# Altium PCB Dual_Channel_Common_VCC_PCB.PcbDoc
Units mm, origin at the board's own origin, x right, y up, seen from the top; angles counter-clockwise.
Board outline 41.15 x 32.38 mm, 2 copper layers (Top Layer, Bottom Layer); 9 components, 14 nets, 33 pads, 0 vias.
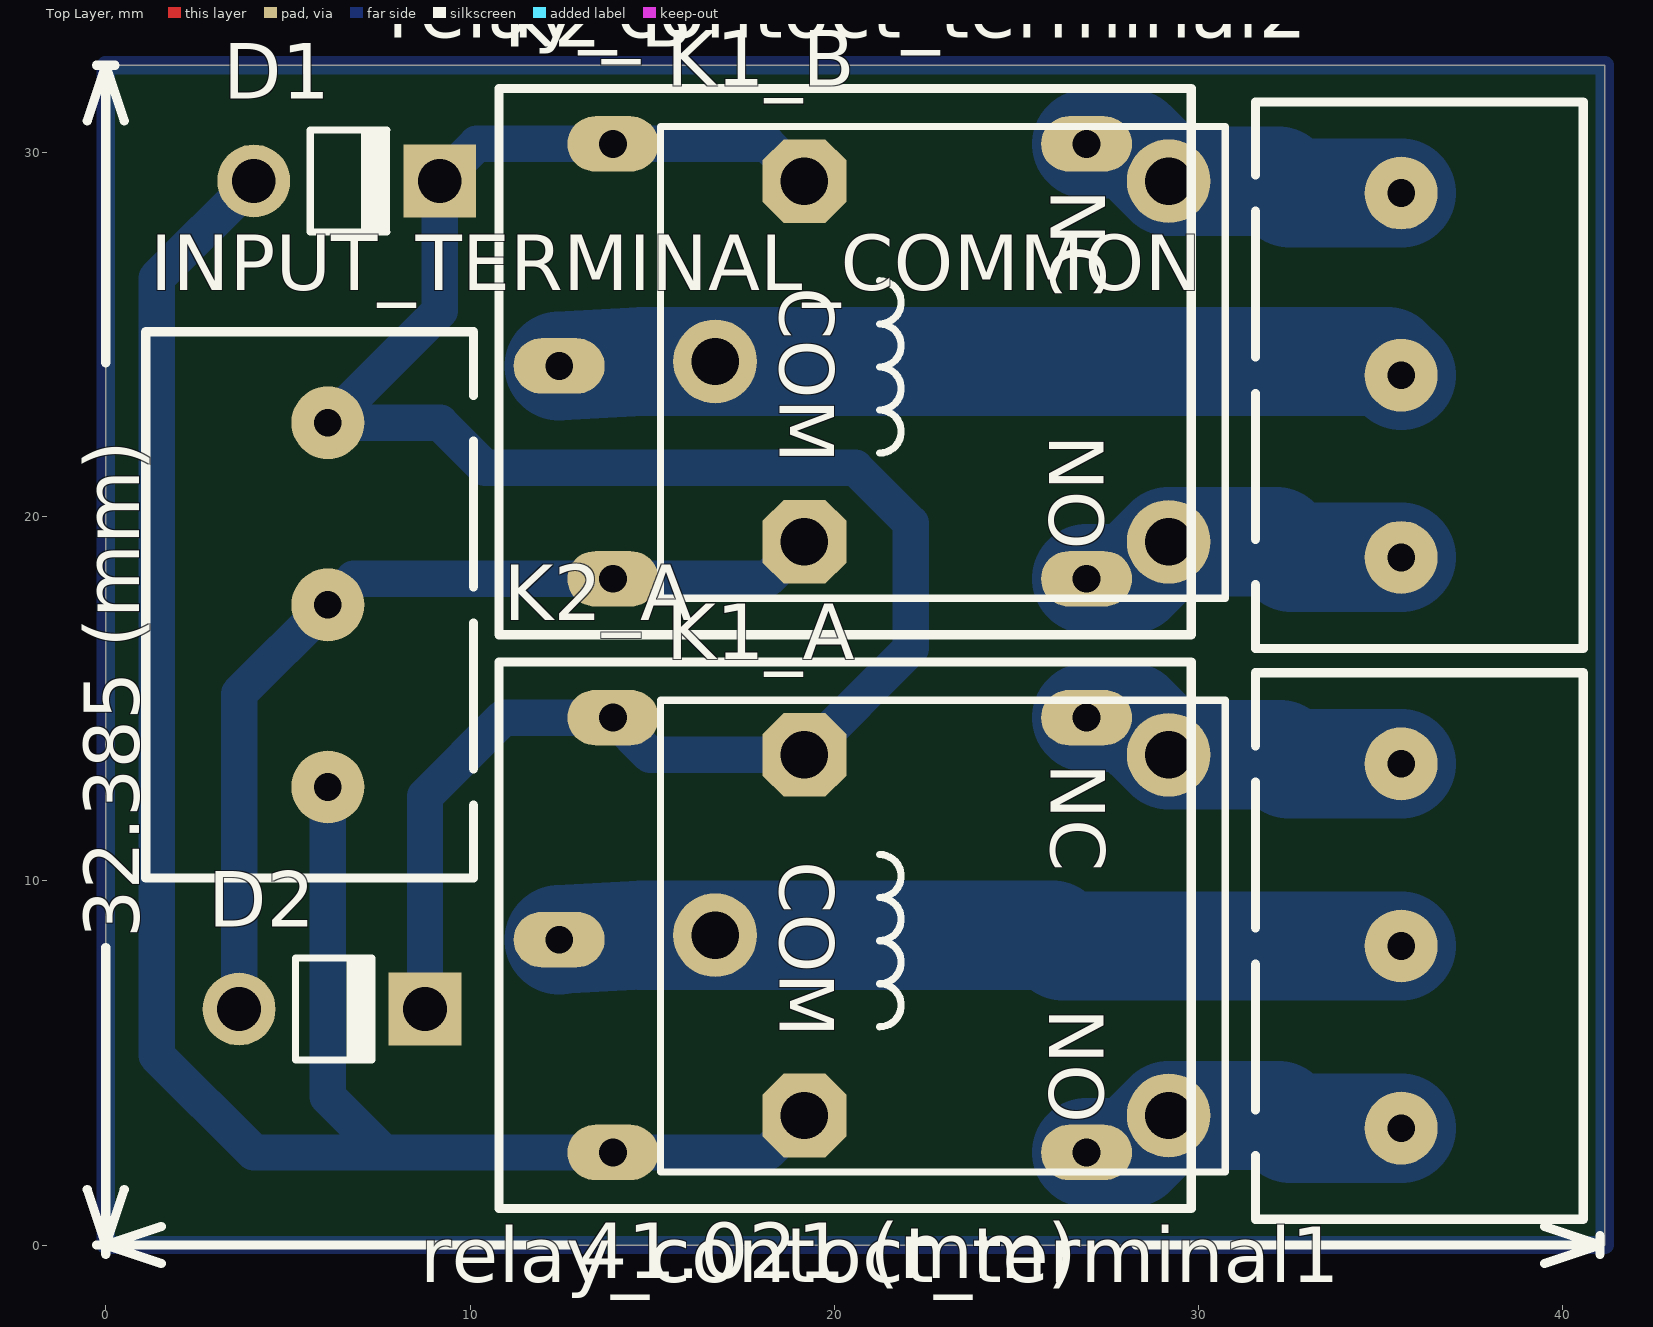
[diagram p0: Top Layer view]
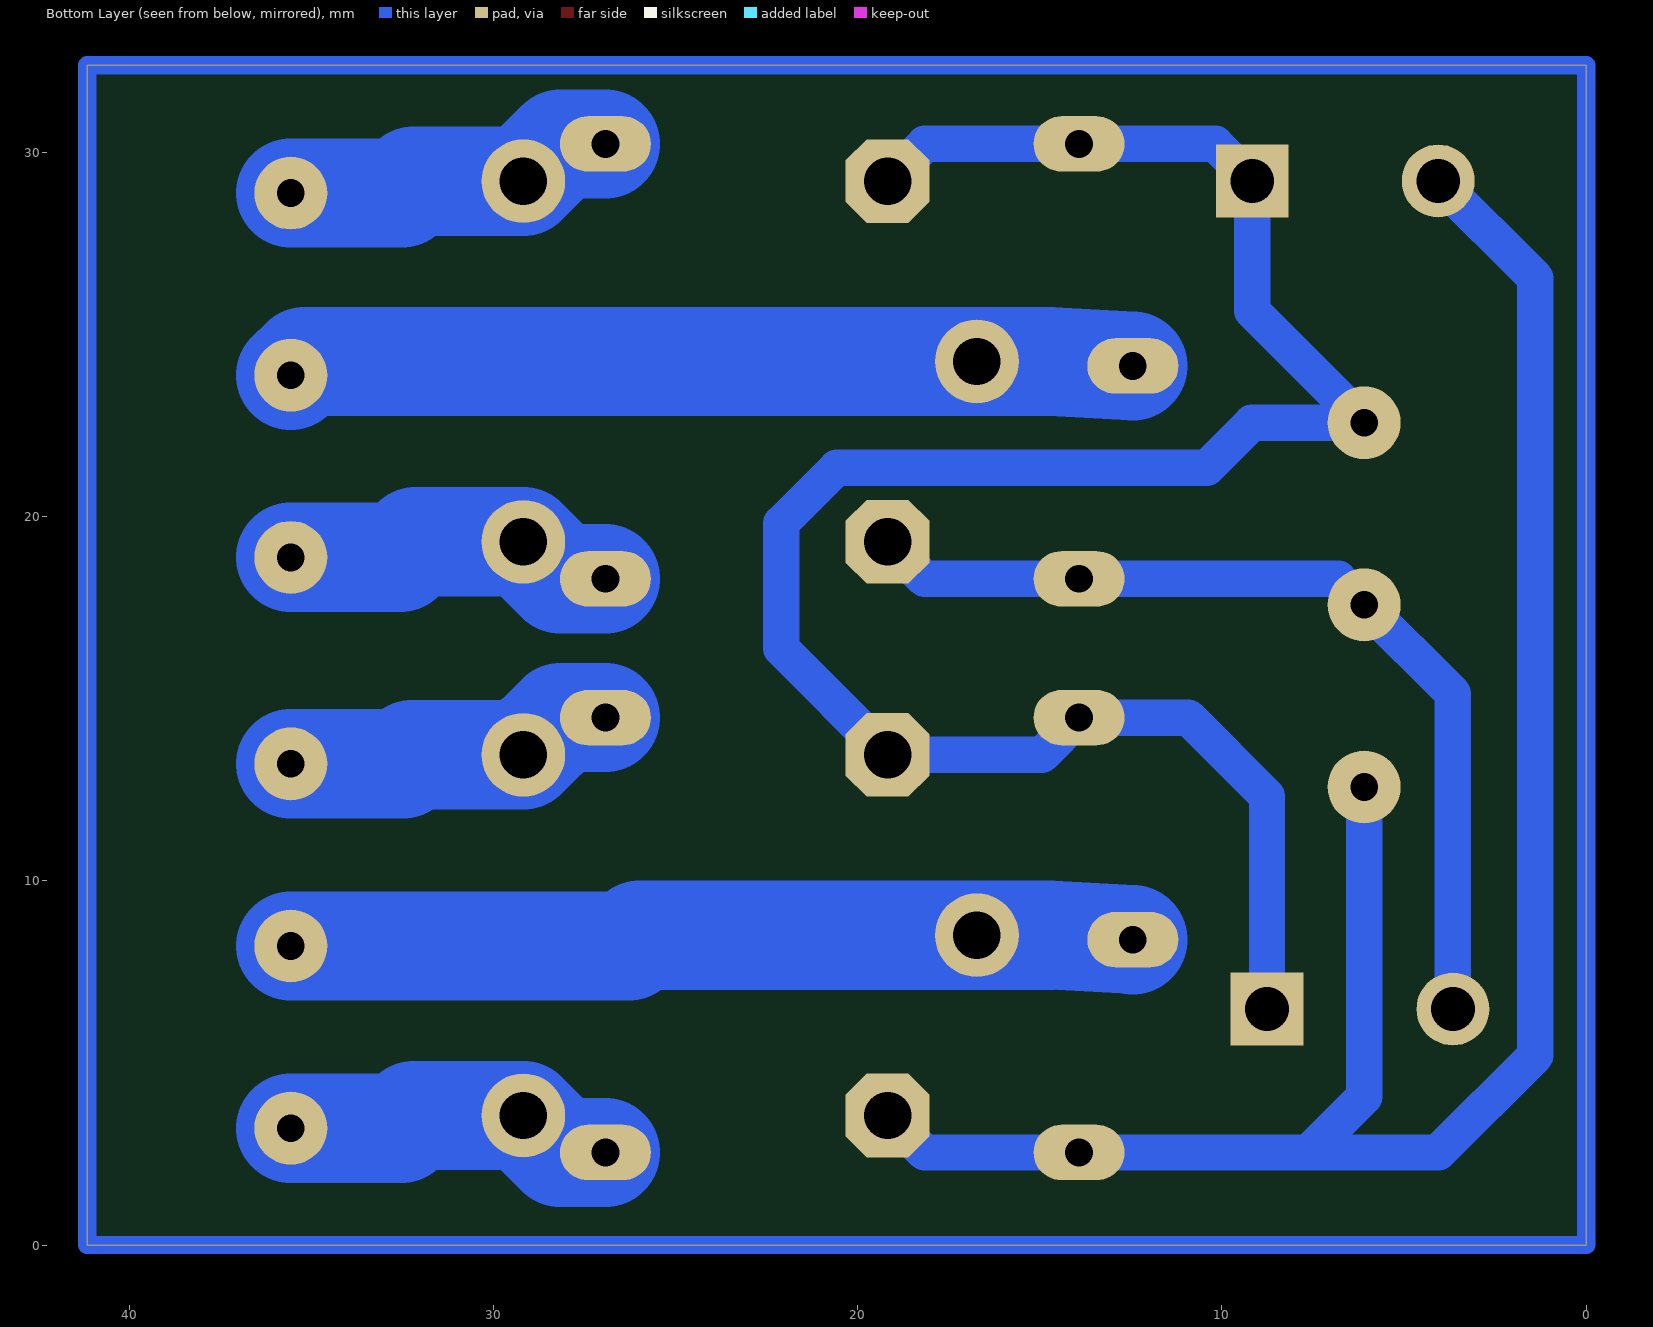
[diagram p1: Bottom Layer view, seen from below]

## Layer stack, top to bottom
Top Solder: solder mask 0.0102, Solder Resist, Dk 3.5
Top Layer: signal copper 0.0356
Dielectric 1: dielectric 0.32, FR-4, Dk 4.8
Bottom Layer: signal copper 0.0356
Bottom Solder: solder mask 0.0102, Solder Resist, Dk 3.5

## Board outline
0,0 0,32.385 41.148,32.385 41.148,0

## Design rules (kind name [scope] priority, off if disabled: settings)
Clearance [All] p1: gap=0.3 ignorepadtopadclearanceinfootprint=FALSE
PolygonConnect [All] p1: connectstyle=Relief reliefconductorwidth=0.254 reliefentries=4 polygonreliefangle="90 Angle" airgapwidth=0.254
RoutingLayers [All] p1: top layer_v5=FALSE bottom layer_v5=TRUE
RoutingVias [All] p1: holewidth=0.711 width=1.27 viastyle="Through Hole" minholewidth=0.711 minwidth=1.27 maxholewidth=0.711 maxwidth=1.27
SolderMaskExpansion [All] p1: expansion=0.102
Width [All] p1: maxlimit=1 minlimit=0.3 preferedwidth=0.5
29 further rules are at their usual default settings.

## Components (designator, comment, footprint, x,y, rotation, side; value= is the part's Value field where it differs from the comment)
D1 "Diode 1N4007 vertical" "D 50mm" 9.294,29.21 r0 top
D2 "Diode 1N4007 vertical" "D 50mm" 8.89,6.477 r0 top
INPUT_TERMINAL_COMMON "Terminal" "Terminal 1*3" 10.096,10.073 r90 top
K1_A "Relay" "Relay 15.40x12.10x13.10" 16.727,8.506 r270 top
K1_B "Relay" "Relay 15.40x12.10x13.10" 16.727,24.254 r270 top
K2_A "Relay-05vDC" Relays 10.795,16.002 r270 top
K2_B "Relay-05vDC" Relays 10.795,31.75 r270 top
relay_contoct_terminal1 "Terminal" "Terminal 1*3" 31.56,15.708 r270 top
relay_contoct_terminal2 "Terminal" "Terminal 1*3" 31.56,31.376 r270 top

## Footprints (in the part's own frame and the unit in brackets; to place one, negate y for a bottom-side part, rotate by r counter-clockwise, add the part's x,y. Pads: shape width x height; smd on the part's side, far side on the other; paste and mask are expansions set on the pad)
"D 50mm" [mm] "50mm Pin Spacing"
  round 2 hole 1.2: 1(-5.23,0)
  rect 2x2 hole 1.2: 2(-0.127,0)
  silkscreen extent -3.68,-1.4 -1.49,1.4
"Relay 15.40x12.10x13.10" [mm]
  round 2.3 hole 1.3: 1(0,0) 2(-4.95,12.45) 3(4.95,12.45)
  oct 2.3x2.3 hole 1.3: 4(-4.95,2.45) 5(4.95,2.45)
  silkscreen extent -6.45,-1.5 6.5,14, body extent -6.05,-1.3 6.05,14, height 15.6
Relays [mil]
  oval 60x98.43 hole 30: 1(300,65) 2(60,635) 3(530,635) 4(60,123.11) 5(530,123.11)
  silkscreen extent 0,0 591,748
"Terminal 1*3" [mm]
  round 2 hole 0.762: 1(2.5,4) 2(7.5,4) 3(12.5,4)
  silkscreen extent 0,0 15,9

## Part data
D1 D2: "1 Amp General Purpose Rectifier", Publisher="seyed mohsen ghasemian"
INPUT_TERMINAL_COMMON relay_contoct_terminal1 relay_contoct_terminal2: library part "Terminal 1*3", "Terminal 3 Pin 250VAC 16A", ComponentLinkURL=www.picpars.com, Designer="Seyed Mohsen Ghasemain", E-mail=picpars@gmail.com
K1_A K1_B: "SPDT Relay", Company=E.P.I.L, Design_Date=2011/10/31, Designer="Eng. Saeid Jorablo"
K2_A K2_B: "Relay-05vDC-240AC 5A", ComponentLinkURL=www.picpars.com, Designer="Seyed Mohsen Ghasemain"

## Nets (pads, with @x,y where several pads share a name; then routed paths per layer and width w, separated by ;. In a path a pad name is that pad's centre, name@x,y a point inside that pad or via, vN(x,y) a via of type N, cw(c..) or ccw(c..) an arc to the next point about the centre after c; other vN are vias at no path point)
GND: 
NetD1_1: D1.1 INPUT_TERMINAL_COMMON.1 K1_A.5 K2_A.5 | length 55.1
  Bottom Layer w1: D1.1 1.397,26.543 1.397,5.207 4.064,2.54 7.62,2.54 ; INPUT_TERMINAL_COMMON.1 6.096,4.064 7.62,2.54 ; K1_A.5 18.161,2.54 K2_A.5 7.62,2.54
NetD2_1: D2.1 INPUT_TERMINAL_COMMON.2 K1_B.5 K2_B.5 | length 25.9
  Bottom Layer w1: D2.1 3.66,15.137 INPUT_TERMINAL_COMMON.2 6.811,18.288 K2_B.5 18.161,18.288 K1_B.5
NetK1_A_1: K1_A.1 K2_A.1 relay_contoct_terminal1.2 | length 23.2
  Bottom Layer w0.5: 25.984,8.506 26.282,8.208
  Bottom Layer w3: K2_A.1 14.704,8.506 K1_A.1 25.984,8.506 ; 26.282,8.208 relay_contoct_terminal1.2
NetK1_A_2: K1_A.2 K2_A.2 relay_contoct_terminal1.1 | length 9.2
  Bottom Layer w3: K2_A.2 28.155,14.478 K1_A.2 32.233,13.456 32.481,13.208 relay_contoct_terminal1.1
NetK1_A_3: K1_A.3 K2_A.3 relay_contoct_terminal1.3 | length 9.2
  Bottom Layer w0.5: 32.182,3.556 32.53,3.208
  Bottom Layer w3: K2_A.3 28.161,2.54 K1_A.3 32.182,3.556 ; 32.53,3.208 relay_contoct_terminal1.3
NetK1_B_1: K1_B.1 K2_B.1 relay_contoct_terminal2.2 | length 23.3
  Bottom Layer w3: K2_B.1 14.704,24.254 K1_B.1 35.182,24.254 relay_contoct_terminal2.2
NetK1_B_2: K1_B.2 K2_B.2 relay_contoct_terminal2.1 | length 9.2
  Bottom Layer w0.5: 32.182,29.204 32.51,28.876
  Bottom Layer w3: K2_B.2 28.155,30.226 K1_B.2 32.182,29.204 ; 32.51,28.876 relay_contoct_terminal2.1
NetK1_B_3: K1_B.3 K2_B.3 relay_contoct_terminal2.3 | length 9.2
  Bottom Layer w3: K2_B.3 28.161,18.288 K1_B.3 32.131,19.304 32.559,18.876 relay_contoct_terminal2.3
NetK2_1: 
NetK2_2: 
NetK2_3: 
NetLED_1: 
VCC: D1.2 D2.2 INPUT_TERMINAL_COMMON.3 K1_A.4 K1_B.4 K2_A.4 K2_B.4 | length 61
  Bottom Layer w1: D2.2 8.763,12.319 10.922,14.478 K2_A.4 14.944,13.456 K1_A.4 22.098,16.377 22.098,19.812 20.574,21.336 10.414,21.336 9.177,22.573 INPUT_TERMINAL_COMMON.3 9.167,25.644 D1.2 10.183,30.226 K2_B.4 18.155,30.226 K1_B.4
copper on no net: | length 147.1
  Bottom Layer w0.5: 0,0 0,32.385 41.148,32.385 41.148,0 0,0

## Silkscreen, mask and mechanical layers (free items; w line width, h text height)
Top Overlay:
  lines w0.254: -0.508,1.524 0,0 ; -0.508,30.861 0,32.385 ; -0.254,0 0.254,0 ; -0.254,32.385 0.254,32.385 ; 0,-0.254 0,0.254 ; 0,8.169 0,0 ; 0,24.216 0,32.385 ; 0.508,1.524 0,0 ; 0.508,30.861 0,32.385 ; 1.524,-0.508 0,0 ; 1.524,0.508 0,0 ; 12.74,0 0,0 ; 28.281,0 41.021,0 ; 39.497,-0.508 41.021,0 ; 39.497,0.508 41.021,0 ; 41.021,-0.254 41.021,0.254
  text "32.385 (mm)" at 0.914,8.423 h1.52 r90
  text "41.021 (mm)" at 12.994,-0.914 h1.52

## Text inside footprints (layer, text, board x,y; h text height)
K1_A: Top Overlay "COM" at 18.505,10.538 h1.5 r270; Top Overlay "NO" at 25.896,6.499 h1.5 r270; Top Overlay "NC" at 25.947,13.23 h1.5 r270
K1_B: Top Overlay "COM" at 18.505,26.286 h1.5 r270; Top Overlay "NO" at 25.896,22.247 h1.5 r270; Top Overlay "NC" at 25.947,28.978 h1.5 r270